# Altium PCB Main_Circuit.PcbDoc
Units mil, origin at the board's own origin, x right, y up, seen from the top; angles counter-clockwise.
Board outline 6000 x 4000 mil, 2 copper layers (Top Layer, Bottom Layer); 29 components, 20 nets, 81 pads, 0 vias.
Unrouted connection lines stored in the file: 39.
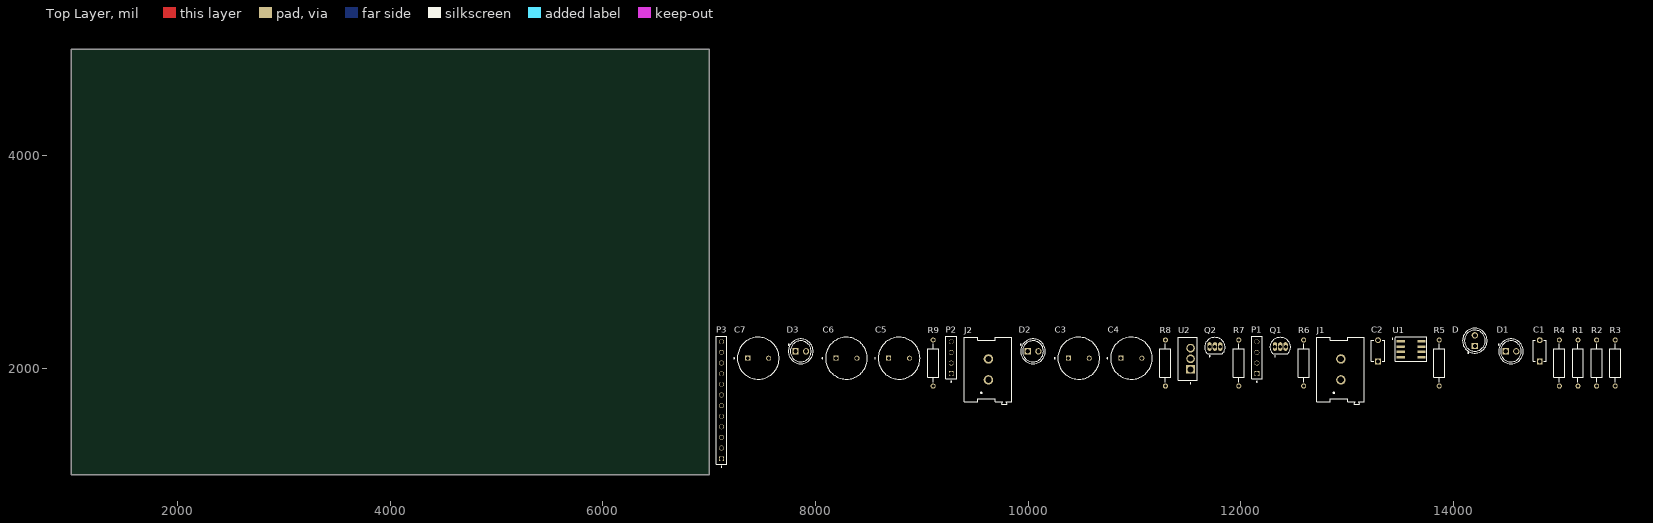
[diagram p0: Top Layer view]
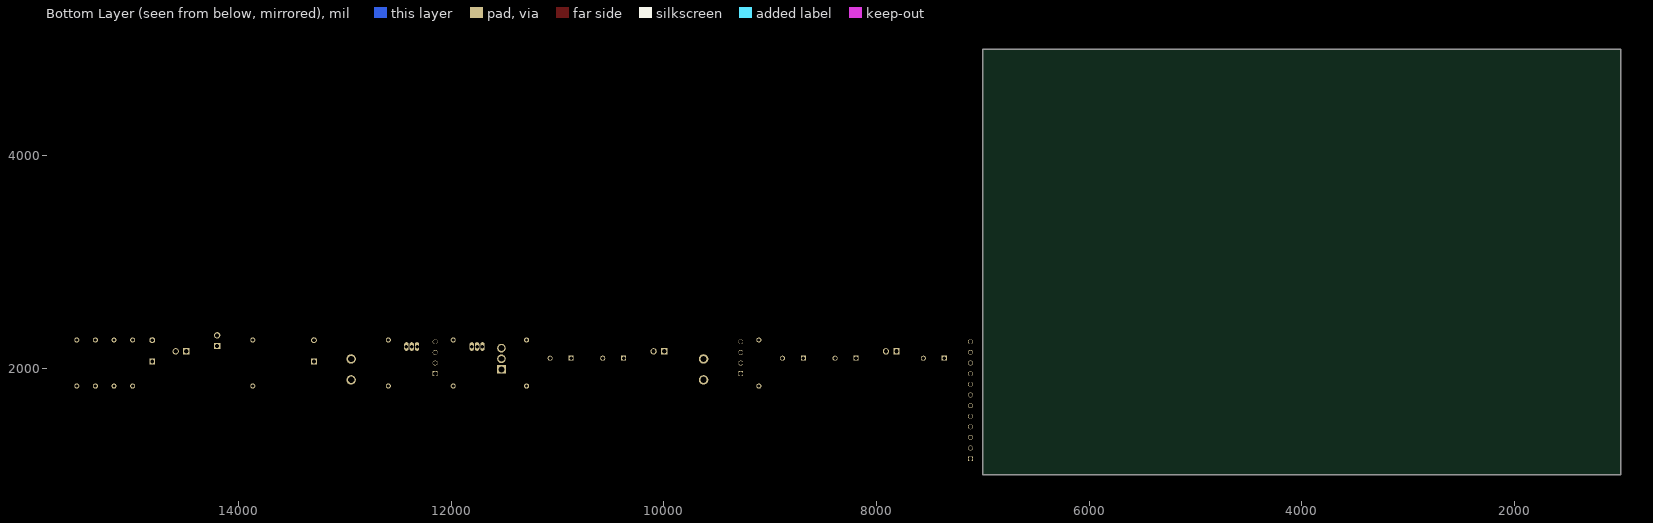
[diagram p1: Bottom Layer view, seen from below]

## Layer stack, top to bottom
Top Solder: solder mask 0.4, Solder Resist, Dk 3.5
Top Layer: signal copper 1.4
Dielectric 1: dielectric 12.6, FR-4, Dk 4.8
Bottom Layer: signal copper 1.4
Bottom Solder: solder mask 0.4, Solder Resist, Dk 3.5

## Board outline
1000,1000 7000,1000 7000,5000 1000,5000

## Design rules (kind name [scope] priority, off if disabled: settings)
Clearance [All] p1: gap=10 ignorepadtopadclearanceinfootprint=FALSE except(0: Arc-Hole Track-Hole SMDPad-Hole THPad-Hole Via-Hole Fill-Hole Poly-Hole Region-Hole Text-Hole)
PolygonConnect [All] p1: connectstyle=Relief reliefconductorwidth=10 reliefentries=4 polygonreliefangle="90 Angle" airgapwidth=10
RoutingVias [All] p1: holewidth=28 width=50 viastyle="Through Hole" minholewidth=28 minwidth=50 maxholewidth=28 maxwidth=50
SolderMaskExpansion [All] p1: expansion=4 istentingtop=FALSE
Width [All] p1: maxlimit=10 minlimit=10 preferedwidth=10
30 further rules are at their usual default settings.

## Classes and differential pairs
component class Main_Circuit: C1 C2 C3 C5 C6 C7 D D1 D2 D3 J1 J2 P1 P2 P3 Q2 R1 R2 R3 R4 R5 R6 R8 R9 U2

## Components (designator, comment, footprint, x,y, rotation, side; value= is the part's Value field where it differs from the comment)
C1 "100nF" CAPRR508W50L508T318H762 14810,2165 r90 top
C2 "1nF" CAPRR508W50L508T318H762 13290,2165 r90 top
C3 "10uF" CAPPRD500W60D1000H2000 10475,2095 r0 top
C4 "10uF" CAPPRD500W60D1000H2000 10970,2095 r0 top
C5 "EEUEB2V100B" CAPPRD500W60D1000H2000 8785,2095 r0 top
C6 "EEUEB2V100B" CAPPRD500W60D1000H2000 8290,2095 r0 top
C7 "EEUEB2V100B" CAPPRD500W60D1000H2000 7460,2095 r0 top
D "CURRENT_INDICATOR" LED_WP7113SEC 14200,2260 r90 top
D1 "12V_INDICATOR" LED_WP7113SEC 14540,2160 r0 top
D2 "5V_INDICATOR" LED_WP7113SEC 10045,2160 r0 top
D3 "WP7113SEC" LED_WP7113SEC 7860,2160 r0 top
J1 "12V IN" 691253410002 12940,1990 r90 top
J2 "5V OUT" 691253410002 9625,1990 r90 top
P1 "PinHeader(4 Pins)(Ultrasonic)" "4 pins connector" 12150,2100 r90 top
P2 "PinHeader(4 Pins)(RGB)" "4 pins connector" 9275,2100 r90 top
P3 "PinHeader" "12 pins connector" 7115,1700 r90 top
Q1 "2N3904" TO92127P495H495-3 12370,2205 r0 top
Q2 "2N3904" TO92127P495H495-3 11755,2205 r0 top
R1 "10K" RESAD1100W55L680D260 15170,2050 r90 top
R2 "10K" RESAD1100W55L680D260 15345,2050 r90 top
R3 "100K" RESAD1100W55L680D260 15520,2050 r90 top
R4 "1K" RESAD1100W55L680D260 14995,2050 r90 top
R5 "1K" RESAD1100W55L680D260 13865,2050 r90 top
R6 "1K" RESAD1100W55L680D260 12590,2050 r90 top
R7 "1K" RESAD1100W55L680D260 11980,2050 r90 top
R8 "220R" RESAD1100W55L680D260 11290,2050 r90 top
R9 "220R" RESAD1100W55L680D260 9105,2050 r90 top
U1 "ACS712ELCTR-05B-T" "SOIC127P600X175-8N - duplicate" 13600,2180 r0 top
U2 "L7805" TO255P1020X450X2000-3 11500,2090 r90 top

## Footprints (in the part's own frame and the unit in brackets; to place one, negate y for a bottom-side part, rotate by r counter-clockwise, add the part's x,y. Pads: shape width x height; smd on the part's side, far side on the other; paste and mask are expansions set on the pad)
"4 pins connector" [mm]
  rect 1.163x1.163 hole 1.02: 01(-3.81,0)
  round 1.163 hole 1.02: 02(-1.27,0) 03(1.27,0) 04(3.81,0)
  silkscreen extent -5.83,-1.27 5.08,1.27
"12 pins connector" [mm]
  rect 1.163x1.163 hole 1.02: 01(-13.97,0)
  round 1.163 hole 1.02: 02(-11.43,0) 03(-8.89,0) 04(-6.35,0) 05(-3.81,0) 06(-1.27,0) 07(1.27,0) 08(3.81,0) 09(6.35,0) 10(8.89,0) 11(11.43,0) 12(13.97,0)
  silkscreen extent -15.99,-1.27 15.24,1.27
691253410002 [mm]
  round 2.25 hole 1.5: 1(-2.5,0) 2(2.5,0)
  silkscreen extent -8.32,-5.6 7.72,5.8
CAPPRD500W60D1000H2000 [mm]
  round 1.2 hole 0.85: N(2.5,0)
  rect 1.2x1.2 hole 0.85: P(-2.5,0)
  silkscreen extent -5.85,-5 5,5, body extent -5,-5 5,5, height 20
CAPRR508W50L508T318H762 [mm]
  rect 1.398x1.398 / inner round 1.398 / far side rect 1.398x1.398 hole 0.89: 1(-2.54,0)
  round 1.398 hole 0.89: 2(2.54,0)
  silkscreen extent -2.54,-1.59 2.54,1.59
LED_WP7113SEC [mm]
  round 1.508 hole 1: A(1.27,0)
  rect 1.508x1.508 hole 1: C(-1.27,0)
  silkscreen extent -3.03,-2.95 2.95,2.95
RESAD1100W55L680D260 [mm]
  round 1.2 hole 0.8: 1(-5.5,0) 2(5.5,0)
  silkscreen extent -4.58,-1.3 4.58,1.3
"SOIC127P600X175-8N - duplicate" [mm]
  rrect25% 1.97x0.6 smd: 1(-2.475,1.905) 2(-2.475,0.635) 3(-2.475,-0.635) 4(-2.475,-1.905) 5(2.475,-1.905) 6(2.475,-0.635) 7(2.475,0.635) 8(2.475,1.905)
  silkscreen extent -4.54,-2.92 3.81,2.92, body extent -3,-2.45 3,2.45, height 1.75
TO255P1020X450X2000-3 [mm]
  rect 2.055x2.055 / inner round 2.055 / far side rect 2.055x2.055 hole 1.37: 1(-2.55,-0.663)
  round 2.055 hole 1.37: 2(0,-0.663) 3(2.55,-0.663)
  silkscreen extent -5.95,-2.25 5.1,2.25, body extent -5.1,-2.25 5.1,2.25, height 20
TO92127P495H495-3 [mm]
  oval 1.04x2.08 hole 0.84: 1(-1.27,0) 2(0,0) 3(1.27,0)
  silkscreen extent -2.48,-2.4 2.48,2.16, body extent -2.28,-1.55 2.28,2.28, height 20.44

## Part data
C1 C2: library part FG24X7R2A104KNT00, "Cap Ceramic 0.1uF 100V X7R 10% Radial 5mm 125Â°C Bulk", Package="Radial TDK", Availability="In Stock", Check_prices=https://www.snapeda.com/parts/FG24X7R2A104KNT00/TDK/view-part/?ref=eda, MF=TDK, MP=FG24X7R2A104KNT00, Price=None, Purchase-URL=https://pricing.snapeda.com/search/part/FG24X7R2A104KNT00/?ref=eda, SnapEDA_Link=https://www.snapeda.com/parts/FG24X7R2A104KNT00/TDK/view-part/?ref=snap
C3 C4: library part EEUEB2V100B, "Aluminum Electrolytic Capacitors - Radial Leaded 10uF 350volts AEC-Q200", Package="RADIAL-2 Panasonic", Availability="In Stock", Check_prices=https://www.snapeda.com/parts/EEU-EB2V100B/Panasonic/view-part/?ref=eda, MF=Panasonic, MP=EEU-EB2V100B, Price=None, SnapEDA_Link=https://www.snapeda.com/parts/EEU-EB2V100B/Panasonic/view-part/?ref=snap
C5 C6 C7: "Aluminum Electrolytic Capacitors - Radial Leaded 10uF 350volts AEC-Q200", Package="RADIAL-2 Panasonic", Availability="In Stock", Check_prices=https://www.snapeda.com/parts/EEU-EB2V100B/Panasonic/view-part/?ref=eda, MF=Panasonic, MP=EEU-EB2V100B, Price=None, SnapEDA_Link=https://www.snapeda.com/parts/EEU-EB2V100B/Panasonic/view-part/?ref=snap
D D1 D2: library part WP7113SEC, "Red 625nm LED Indication - Discrete 2.2V Radial", Package="Radial Kingbright", Arrow_Electronics-Purchase-URL=https://snapeda.com/shop?store=Arrow+Electronics&id=1233302, Availability=Good, DigiKey-Purchase-URL=https://snapeda.com/shop?store=DigiKey&id=1233302, MF=Kingbright, Mouser-Purchase-URL=https://snapeda.com/shop?store=Mouser&id=1233302, MP=WP7113SEC, Price=None, SnapEDA_Link=https://www.snapeda.com/parts/WP7113SEC/Kingbright/view-part/1233302/?ref=snap
D3: "Red 625nm LED Indication - Discrete 2.2V Radial", Package="Radial Kingbright", Arrow_Electronics-Purchase-URL=https://snapeda.com/shop?store=Arrow+Electronics&id=1233302, Availability=Good, DigiKey-Purchase-URL=https://snapeda.com/shop?store=DigiKey&id=1233302, MF=Kingbright, Mouser-Purchase-URL=https://snapeda.com/shop?store=Mouser&id=1233302, MP=WP7113SEC, Price=None, SnapEDA_Link=https://www.snapeda.com/parts/WP7113SEC/Kingbright/view-part/1233302/?ref=snap
J1 J2: library part 691253410002, "7.62 MM TERMINAL BLOCK, HORIZONT", Package=None, Availability="In Stock", Check_prices=https://www.snapeda.com/parts/691253410002/Wurth+Electronics+Inc./view-part/?ref=eda, MF="WÃ¼rth Elektronik", MP=691253410002, Price=None, Purchase-URL=https://pricing.snapeda.com/search?q=691253410002&ref=eda, SnapEDA_Link=https://www.snapeda.com/parts/691253410002/Wurth+Electronics+Inc./view-part/?ref=snap
Q1 Q2: "TRANS NPN 40V 200MA TO92-3", Package="TO-226-3 Rectron", Availability="In Stock", Check_prices=https://www.snapeda.com/parts/2N3904/Rectron/view-part/?ref=eda, MF=Rectron, MP=2N3904, Price=None, Purchase-URL=https://pricing.snapeda.com/search/part/2N3904/?ref=eda, SnapEDA_Link=https://www.snapeda.com/parts/2N3904/Rectron/view-part/?ref=snap
R1 R2 R3 R4 R5 R6 R7 R8 R9: library part MFR-25FBF52-3K16, "RES 280K OHM 1/4W 1% AXIAL", Package=None, Availability=Unavailable, MP=MFR-25FBF52-3K16, Price=None
U1: "Current Sensor 5A 1 Channel Hall Effect, Open Loop Bidirectional 8-SOIC (0.154, 3.90mm Width)", Package="SOIC-8 Allegro MicroSystems LLC", Availability="In Stock", Check_prices=https://www.snapeda.com/parts/ACS712ELCTR-05B-T/Allegro+MicroSystems+LLC/view-part/?ref=eda, MF="Allegro MicroSystems LLC", MP=ACS712ELCTR-05B-T, Price=None, Purchase-URL=https://pricing.snapeda.com/search/part/ACS712ELCTR-05B-T/?ref=eda, SnapEDA_Link=https://www.snapeda.com/parts/ACS712ELCTR-05B-T/Allegro+MicroSystems+LLC/view-part/?ref=snap
U2: "Standard Regulator Pos 5V 1.5A 3-Pin(3+Tab) TO-220FP Tube", Package=None, Availability="Not in stock", Check_prices=https://www.snapeda.com/parts/L7805/STMicroelectronics/view-part/?ref=eda, MF=STMicroelectronics, MP=L7805, Price=None, SnapEDA_Link=https://www.snapeda.com/parts/L7805/STMicroelectronics/view-part/?ref=snap

## Nets (pads, with @x,y where several pads share a name; then routed paths per layer and width w, separated by ;. In a path a pad name is that pad's centre, name@x,y a point inside that pad or via, vN(x,y) a via of type N, cw(c..) or ccw(c..) an arc to the next point about the centre after c; other vN are vias at no path point)
+5: C1.1 C4.P J2.1 P1.04 R4.1 R8.2 R9.1 U1.8 U2.3
+12V0: J1.2 R3.2 R5.1 U1.1 U1.2
A0: Q1.1 Q2.1
GND: C1.2 C2.2 C3.N C4.N D1.C D2.C D.C J1.1 J2.2 P1.01 R1.1 U1.5 U2.2
NetC2_1: C2.1 U1.6
NetC3_P: C3.P U1.3 U1.4 U2.1
NetD1_A: D1.A R5.2
NetD2_A: D2.A R8.1
NetD_A: D.A R4.2
NetP2_04: P2.04 R9.2
NetQ1_2: Q1.2 R6.2
NetQ1_3: Q1.3 U1.7
NetQ2_2: Q2.2 R7.2
NetQ2_3: Q2.3 R2.2 R3.1
NetR1_2: R1.2 R2.1
NPN_C: R6.1
NPN_V: R7.1
RGB_B: P2.02
RGB_G: P2.03
RGB_R: P2.01
pads on no net: C5.N C5.P C6.N C6.P C7.N C7.P D3.A D3.C P1.02 P1.03 P3.01 P3.02 P3.03 P3.04 P3.05 P3.06 P3.07 P3.08 P3.09 P3.10 P3.11 P3.12